# Altium PCB Sensor_Box_Hub_SAMD21.PCBDOC (part 3 of 3)
Units mm, origin at the board's own origin, x right, y up, seen from the top; angles counter-clockwise.
Board outline 33.7 x 72.8 mm, 2 copper layers (Top, Bot), stack 1.571 mm thick; 108 components, 111 nets, 446 pads, 221 vias.
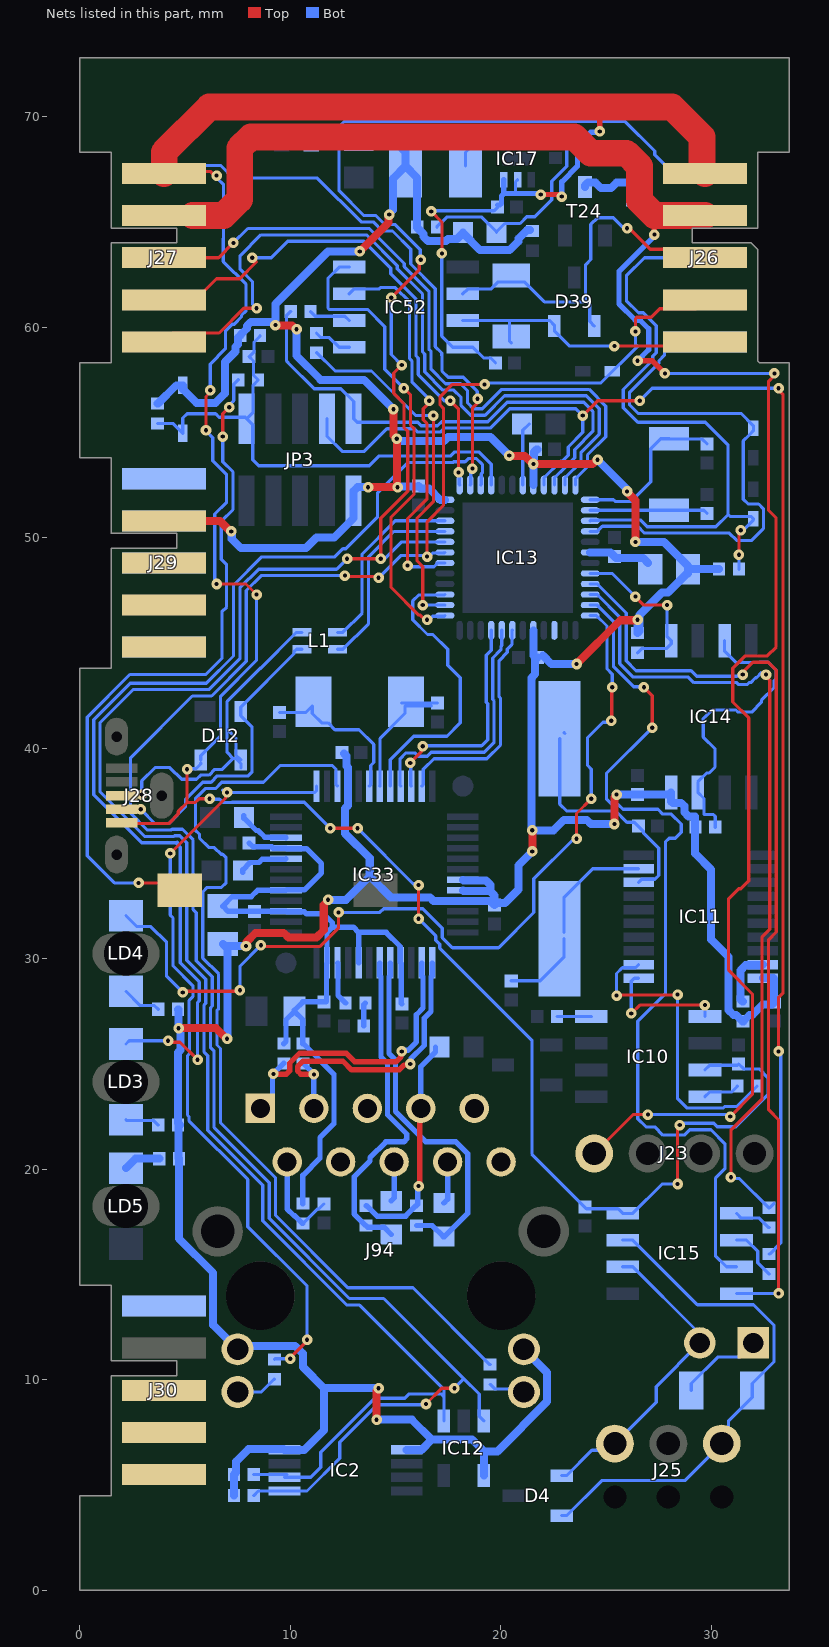
[diagram p2: the nets of this part, all layers, seen from the top]

## Via types
v1: diameter 0.5, hole 0.2, Top to Bot, tented both sides, 217 vias
v2: diameter 0.5, hole 0.2, Top to Bot, 2 vias
v3: diameter 1.2, hole 0.8, Top to Bot, tented both sides, 2 vias

## Nets (pads, with @x,y where several pads share a name; then routed paths per layer and width w, separated by ;. In a path a pad name is that pad's centre, name@x,y a point inside that pad or via, vN(x,y) a via of type N, cw(c..) or ccw(c..) an arc to the next point about the centre after c; other vN are vias at no path point) (continued)
IO0: D7.1 IC13.3 J26.8 R492.2 | length 31.7
  Top w0.152: v2(31.314,49.189) 31.314,50.264 v2(31.4,50.35)
  Bot w0.152: IC13.3@24.25,50.8 24.278,50.828 24.687,50.828 24.702,50.843 26.633,50.843 26.955,50.521 30.221,50.521 30.8,51.1 ; J26.8@29.7,63.3 26.828,63.3 25.971,62.443 25.971,61.257 26.543,60.685 26.767,60.685 27.385,60.067 27.385,58.782 27.217,58.614 27.217,58.44 25.817,57.04 25.817,56.176 26.514,55.479 29.715,55.479 30.8,54.393 30.8,51.1 ; R492.2@31.314,48.505 v2(31.314,49.189) ; v2(31.4,50.35) 31.516,50.35 32,50.834 D7.1@32,50.9 31.889,51.011 30.889,51.011 30.8,51.1
IO1: D6.1 IC13.4 J26.10 | length 26.3
  Bot w0.152: IC13.4@24.25,50.3 24.59,50.3 24.829,50.539 26.507,50.539 26.829,50.217 30.857,50.217 31.202,49.871 31.92,49.871 32.479,50.43 32.479,51.37 32.248,51.6 31.752,51.6 31.521,51.83 31.521,54.598 31.824,54.901 31.826,54.901 32,55.075 D6.1@32,55.2 32,55.325 31.425,55.9 26.523,55.9 26.121,56.302 26.121,56.913 27.521,58.313 27.521,58.415 27.776,58.67 27.776,58.876 28.2,59.3 J26.10@29.7,59.3
MODBUS_A: D39.1 IC52.6 J26.3 R14.2 | length 18.1
  Top w0.152: v1(26,64.7) 26.1,64.7 27.1,63.7 28.999,63.7 29.3,63.4 29.45,63.55 J26.3@29.7,63.3
  Bot w0.152: IC52.6@18.2,61.585 18.424,61.809 19.534,61.809 19.875,62.15 21.125,62.15 22.075,61.2 24.1,61.2 ; D39.1@24.45,60.05 24.226,60.274 24.226,61.074 24.1,61.2 ; v1(26,64.7) 25.85,64.7 25.35,65.2 24.6,65.2 24.279,64.879 24.279,63.213 24.029,62.963 24.029,61.271 24.1,61.2
MODBUS_B: D39.2 IC52.7 J26.5 R14.1 | length 13.3
  Top w0.152: v1(25.4,59.1) 29.5,59.1 J26.5@29.7,59.3
  Bot w0.152: IC52.7@18.2,60.315 20.415,60.315 ; R14.1@20.5,59.25 20.415,59.335 20.415,60.315 ; v1(25.4,59.1) 23.275,59.1 22.55,59.825 D39.2@22.55,60.05 22.55,60.091 22.326,60.315 20.415,60.315
MODBUS_DE: IC13.30 IC52.3 | length 18.6
  Top w0.152: v1(15.573,48.673) 15.573,50.903 16.493,51.823 16.493,55.43 16.321,55.602 16.321,56.127 16.6,56.406 v1(16.6,56.5)
  Bot w0.152: IC52.3@12.8,61.585 13.024,61.809 14.214,61.809 14.283,61.878 14.998,61.878 15.672,61.204 15.672,58.504 15.779,58.398 15.779,57.398 16.6,56.577 v1(16.6,56.5) ; v1(15.573,48.673) 15.625,48.621 16.831,48.621 17.01,48.8 IC13.30@17.35,48.8
MODBUS_DI: IC13.25 IC52.4 | length 22.4
  Top w0.152: v1(15.4,57.1) 15.712,56.788 15.712,55.349 15.883,55.178 15.883,52.076 14.79,50.982 14.79,47.633 16.102,46.321 16.184,46.321 16.406,46.1 v1(16.5,46.1)
  Bot w0.152: IC52.4@12.8,62.855 12.325,62.855 11.796,62.326 11.796,60.904 11.856,60.844 13.67,60.844 14.495,60.018 14.495,58.005 v1(15.4,57.1) ; v1(16.5,46.1) 16.594,46.1 16.766,46.272 17.322,46.272 IC13.25@17.35,46.3
MODBUS_R_En: IC52.2 R13.1 | length 2
  Bot w0.152: R13.1@10.97,60.75 10.97,60.73 11.184,60.516 12.599,60.516 IC52.2@12.8,60.315
MODBUS_RO: IC13.26 R18.1 | length 17.3
  Top w0.152: v1(16.3,46.8) 16.3,48.623 16.021,48.902 16.021,50.92 16.8,51.699 v1(16.8,55.8)
  Bot w0.152: R18.1@11.25,58.78 11.27,58.78 12.133,57.917 13.86,57.917 15.977,55.8 v1(16.8,55.8) ; v1(16.3,46.8) IC13.26@17.35,46.8
NetC43_2: C43.2 IC13.2 Q3.1 | length 5.6
  Bot w0.152: IC13.2@24.25,51.3 Q3.1@28,51.3 29.65,51.3 C43.2@29.8,51.15
NetC44_1: C44.1 IC13.1 Q3.2 | length 7.8
  Bot w0.152: IC13.1@24.25,51.8 25.355,51.8 25.433,51.721 26.198,51.721 27.126,52.649 27.126,54.226 27.6,54.7 Q3.2@28,54.7 28.016,54.684 29.566,54.684 C44.1@29.8,54.45
NetC45_2: C45.2 IC11.9 Q2.1 | length 9.6
  Bot w0.152: C45.2@20.5,28.95 21.876,28.95 23,30.074 Q2.1@23,30.95 ; Q2.1@23,31.25 23,32.9 24.375,34.275 IC11.9@26.55,34.275
NetC46_2: C46.2 IC11.8 Q2.2 | length 11.2
  Bot w0.152: Q2.2@22.8,40.45 22.8,37.347 23.13,37.017 24.86,37.017 25.46,37.017 25.993,36.484 26.333,36.484 26.784,36.033 26.784,35.964 27.504,35.245 27.504,33.955 27.322,33.774 26.699,33.774 IC11.8@26.55,33.625 ; Q2.2@23,40.75 Q2.2@23.05,40.7
NetC49_2: C49.2 IC13.43 | length 3
  Bot w0.152: IC13.43@21.05,52.5 21.05,55.1 C49.2@21.35,55.4
NetC51_1: C51.1 FB2.2 IC13.6 | length 3
  Bot w0.381: IC13.6@24.25,49.3 24.257,49.293 25.207,49.293 C51.1@25.4,49.1 25.466,49.034 26.766,49.034 FB2.2@27,48.8
NetC57_1: C57.1 IC17.6 R74.1 R75.2 | length 11.2
  Bot w0.152: R74.1@16.97,64.75 16.97,64.77 17.429,65.229 19.096,65.229 C57.1@19.8,64.525 ; C57.1@19.8,64.5 C57.1@19.8,64.525 ; IC17.6@21.45,69 22.57,69 R75.2@22.6,68.97 22.62,68.97 23.139,68.451 23.139,67.645 22.421,66.928 22.421,66.044 21.617,65.24 21.233,65.24 20.917,64.924 20.199,64.924 C57.1@19.8,64.525
NetC105_2: C105.2 IC33.22 | length 2.5
  Bot w0.254: C105.2@7.8,36.8 C105.2@7.8,36.7 7.8,36.675 8.386,36.089 8.476,36.089 8.792,35.773 9.777,35.773 IC33.22@9.8,35.75
NetC106_1: C106.1 IC33.20 | length 2.4
  Bot w0.254: C106.1@7.75,34.1 7.75,34.225 8.098,34.573 8.515,34.573 8.669,34.727 9.777,34.727 IC33.20@9.8,34.75
NetC114_2: C114.2 IC33.30 X1.1 | length 7.6
  Bot w0.152: C114.2@9.5,41.7 10.75,41.7 11.05,42 11.05,41.65 11.5,41.2 11.8,41.2 12.124,40.876 13.267,40.876 13.963,40.18 13.963,39.32 13.822,39.179 13.822,38.272 IC33.30@13.75,38.2
NetC115_2: C115.2 IC33.31 X1.2 | length 7.2
  Bot w0.152: IC33.31@14.25,38.2 14.268,38.218 14.268,40.468 15.45,41.65 15.45,42 C115.2@16.7,42 ; X1.2@15.3,42.15 C115.2@17,42.15
NetC118_1: C118.1 J94.9 R130.2 | length 4.6
  Bot w0.152: R130.2@10.6,17.43 10.62,17.43 11.306,18.116 11.366,18.116 C118.1@11.6,18.35
  Bot w0.254: J94.9@9.855,20.35 9.855,18.12 10.19,17.785 10.225,17.785 10.58,17.43 R130.2@10.6,17.43
NetC119_2: C119.2 J94.4 R131.1 R132.1 | length 10.7
  Top w0.254: v1(16.1,19.2) 16.147,19.247 16.147,22.832 J94.4@16.205,22.89
  Bot w0.254: R131.1@13.6,18.27 13.62,18.27 14.119,17.771 15.481,17.771 15.98,18.27 R132.1@16,18.27 16.053,18.323 16.053,19.153 v1(16.1,19.2) ; J94.4@16.205,22.89 16.205,24.88 16.9,25.575 C119.2@16.9,25.8
NetD4_1: D4.1 IC15.6 J25.1 JP2.2 | length 15
  Bot w0.152: D4.1@22.9,5.45 23.125,5.45 24.33,6.655 25.105,6.655 J25.1@25.42,6.97 27.388,8.938 27.388,9.678 JP2.2@29.46,11.75 29.202,12.008 29.202,12.438 26.275,15.365 IC15.6@25.8,15.365
NetD4_2: D4.2 IC15.7 J25.3 R59.1 | length 24.5
  Bot w0.152: D4.2@22.9,3.55 23.125,3.55 24.789,5.214 28.744,5.214 J25.3@30.5,6.97 30.815,7.285 30.815,8.04 31.95,9.175 R59.1@31.95,9.5 31.95,9.825 32.979,10.854 32.979,12.595 32.007,13.566 29.344,13.566 26.275,16.635 IC15.7@25.8,16.635
NetD5_1: D5.1 R19.2 T24.3 | length 4.2
  Bot w0.381: T24.3@24,66.65 24,66.736 24.135,66.87 24.491,66.87 24.754,66.607 25.246,66.607 25.509,66.87 26.151,66.87 R19.2@26.25,66.97 26.244,66.976 26.244,67.831 25.825,68.25 D5.1@25.7,68.25
NetD12_2: D12.2 J28.2 L1.4 | length 14.2
  Bot w0.152: v1(2.899,37.1) 3.577,36.421 4.223,36.421 5.033,37.231 5.033,37.576 5.843,38.386 6.24,38.386 6.538,38.683 8.007,38.683 8.179,38.855 8.179,41.021 7.65,41.55 D12.2@7.65,41.75 7.65,41.95 10.176,44.476 10.176,44.576 10.3,44.7 L1.4@10.55,44.7
NetD12_3: D12.3 J28.3 L1.1 | length 16
  Bot w0.152: v1(2.948,37.8) 2.948,38.449 3.577,39.079 4.284,39.079 4.841,38.521 5.547,38.521 5.747,38.721 6.145,38.721 6.417,38.994 6.778,38.994 7.251,39.467 ; D12.3@7.65,39.45 7.426,39.674 7.426,40.474 7,40.9 ; D12.3@7.659,39.059 7.659,39.275 7.426,39.508 7.292,39.508 7,39.8 7,40.9 ; L1.1@10.55,45.5 10.3,45.5 8.6,43.8 8.576,43.8 7,42.223 7,40.9
NetIC10_1: IC10.1 IC11.1 | length 6.1
  Top w0.152: v1(26.2,27.4) 26.21,27.4 26.61,27.8 v1(29.7,27.8)
  Bot w0.152: v1(26.2,27.4) 26.2,28.926 26.349,29.075 IC11.1@26.55,29.075 ; IC10.1@29.7,27.255 v1(29.7,27.8)
NetIC10_4: IC10.4 R58.1 | length 1.8
  Bot w0.152: IC10.4@29.7,23.445 29.924,23.669 30.969,23.669 31.23,23.93 R58.1@31.23,23.95
NetIC10_8: IC10.8 R57.2 | length 1.6
  Bot w0.152: R57.2@22.67,27.25 24.295,27.25 IC10.8@24.3,27.255
NetIC11_2: IC11.2 R58.2 | length 14.5
  Top w0.152: v1(25.5,28.25) 25.525,28.275 28.375,28.275 v1(28.4,28.3)
  Bot w0.152: v1(25.5,28.25) 25.5,29.298 25.778,29.576 26.401,29.576 IC11.2@26.55,29.725 ; v1(28.4,28.3) 28.4,23.347 28.83,22.916 30.57,22.916 30.632,22.979 31.219,22.979 32.17,23.93 R58.2@32.17,23.95
NetIC11_19: IC11.19 R56.2 | length 2.7
  Bot w0.381: R56.2@31.5,27.97 31.482,27.97 31.382,28.069 31.382,29.442 31.631,29.691 32.416,29.691 IC11.19@32.45,29.725
NetIC14_3: IC14.3 IC14.7 R70.1 | length 14.7
  Bot w0.152: R70.1@30.19,36.25 30.19,36.76 30.1,36.85 29.653,36.85 29.653,37.612 IC14.7@29.365,37.9 29.365,38.4 29.786,38.821 29.898,38.821 30.179,39.102 30.179,39.971 29.621,40.529 29.621,41.398 30.04,41.817 31.175,41.817 31.275,41.717 31.924,41.717 32.383,42.175 32.383,42.27 32.979,42.866 32.979,43.202 33.079,43.302 33.079,43.698 32.979,43.798 32.698,44.079 32.307,44.079 32.3,44.071 31.51,44.071 31.503,44.079 31.302,44.079 31.229,44.006 30.635,44.6 IC14.3@30.635,45.1
NetIC15_1: IC15.1 R64.2 | length 1.8
  Bot w0.152: IC15.1@31.2,17.905 31.424,17.681 32.279,17.681 32.73,17.23 R64.2@32.75,17.23
NetIC17_4: IC17.4 L3.1 | length 2.8
  Bot w0.152: L3.1@18.325,67.65 18.325,68.301 19.024,69 IC17.4@20.15,69
NetIC33_10: IC33.10 R127.1 | length 2.1
  Bot w0.254: IC33.10@12.25,29.8 12.273,29.777 12.273,28.257 R127.1@12.63,27.9
NetIC33_25: IC33.25 R125.1 | length 36.8
  Top w0.152: v1(4.3,35) 6.933,37.633 6.933,37.833 v1(7,37.9) ; v1(10,11) 10,11.05 10.8,11.85 v1(10.8,11.9)
  Bot w0.152: v1(4.3,35) 4.3,32.073 4.433,31.94 4.433,29.671 5.379,28.726 5.379,28.202 5.198,28.022 5.198,26.762 5.212,26.748 5.212,25.489 5.121,25.398 5.121,22.572 5.189,22.505 5.189,22.311 7.984,19.516 7.984,17.271 10.8,14.454 v1(10.8,11.9) ; v1@6.8,38 6.806,38 6.906,37.9 v1(7,37.9) 11.176,37.9 11.25,37.974 IC33.25@11.25,38.2 ; R125.1@9.25,10.97 9.28,11 v1(10,11)
NetIC33_27: IC33.27 R126.1 | length 44.3
  Bot w0.152: IC33.27@12.25,38.2 12.176,38.274 12.176,38.997 11.995,39.179 9.531,39.179 8.731,38.379 6.748,38.379 6.45,38.081 5.969,38.081 5.496,37.609 5.496,36.105 5.693,35.909 5.693,35.73 6.145,35.279 6.398,35.279 6.715,34.961 6.787,34.961 6.954,34.795 6.954,33.605 6.736,33.388 6.064,33.388 5.846,33.17 5.846,30.03 6.598,29.279 6.598,27.629 6.521,27.552 6.521,25.902 6.688,25.735 6.688,22.204 9.305,19.587 9.305,17.802 12.739,14.368 15.832,14.368 19.48,10.72 R126.1@19.5,10.72
NetIC52_1: IC52.1 R18.2 | length 1.8
  Bot w0.152: R18.2@11.25,59.72 11.464,59.506 11.864,59.506 12.325,59.045 IC52.1@12.8,59.045
NetJ26_7: J26.7 R19.1 | length 3.8
  Bot w0.381: R19.1@26.25,66.03 26.27,66.03 27,65.3 J26.7@29.7,65.3
NetJ94_1: J94.1
NetJ94_2: J94.2
NetJ94_6: J94.6
NetJ94_7: J94.7
NetJP2_1: JP2.1 R59.2 | length 4.1
  Bot w0.152: R59.2@29.05,9.5 29.05,9.825 30.301,11.076 31.326,11.076 JP2.1@32,11.75
NetLD3_2: LD3.2 R71.1 | length 1.6
  Bot w0.152: LD3.2@2.2,22.35 2.236,22.314 3.516,22.314 R71.1@3.73,22.1
NetLD4_2: LD4.2 R72.1 | length 1.9
  Bot w0.152: LD4.2@2.2,28.45 2.874,27.776 3.554,27.776 R72.1@3.73,27.6
NetLD5_2: LD5.2 R73.1 | length 1.8
  Bot w0.381: LD5.2@2.2,20.05 2.65,20.5 R73.1@3.78,20.5
NetPB1_2: PB1.2 R68.2 | length 33.1
  Top w0.152: v1(2.8,33.6) 4.4,33.6 PB1.2@4.75,33.25 ; v1(6.8,54.8) 6.8,55.886 6.914,56
  Bot w0.152: v1(2.8,33.6) 1.649,33.6 0.362,34.887 0.362,41.475 2.387,43.5 5.994,43.5 6.757,44.263 6.757,46.48 6.979,46.702 6.979,48.722 6.721,48.979 6.721,50.771 7.283,51.333 7.283,53.124 6.8,53.608 v1(6.8,54.8) ; v1(7.1,56.2) 7.1,56.294 7.316,56.51 7.316,57.286 R68.2@7.53,57.5
NetR127_2: R127.2 R262.1 | length 1.1
  Bot w0.254: R262.1@13.497,26.804 13.497,27.827 R127.2@13.57,27.9
P3V3: C41.2 C50.1 C52.1 C53.1 C54.1 C56.1 C57.2 C108.1 C110.1 D3.1 FB2.1 FB7.1 IC2.1 IC2.8 IC11.20 IC12.4 IC13.17 IC13.36 IC13.44 IC14.8 IC33.28 IC33.43 IC33.44 IC33.45 J29.2 J94.L1 J94.L3 JP3.1 L3.2 R20.2 R56.1 R62.2 R63.2 R66.1 R67.2 R69.2 R70.2 R71.2 R72.2 R73.2 R74.2 R492.1 | length 215.5
  Top w0.381: J29.2@4,50.8 6.668,50.8 7.168,50.3 v1(7.2,50.3) ; v1(4.7,26.7) 6.468,26.7 6.968,26.2 v1(7,26.2) ; v1(7.9,30.6) 7.923,30.623 7.923,30.791 8.363,31.231 9.692,31.231 9.916,31.007 11.246,31.007 11.593,31.354 11.593,32.561 11.8,32.768 v1(11.8,32.8) ; v1(9.3,60.1) 9.323,60.077 10.091,60.077 10.268,59.9 v1(10.3,59.9) ; v1(13.3,63.6) 14.677,64.977 14.677,65.327 v1(14.7,65.35) ; v1(13.7,52.4) v1(15.1,52.4) 15.082,52.418 15.082,54.682 v1(15.064,54.7) 14.9,54.864 v1(14.9,56.1) ; v1(14.1,8.1) 14.1,9.468 14.2,9.568 v1(14.2,9.6) ; v1(20.4,53.9) 20.423,53.877 21.141,53.877 21.518,53.5 v1(21.55,53.5) 24.368,53.5 24.568,53.7 v1(24.6,53.7) ; v1(21.5,35.1) v1(21.5,36.1) ; v1(23.6,44) 25.679,46.078 26.478,46.078 v1(26.5,46.1) ; v1(25.4,36.4) 25.4,37.668 25.5,37.768 v1(25.5,37.8) ; v1(26,52.2) 26,52.168 26.4,51.768 v1(26.4,49.8)
  Bot w0.381: R66.1@3.7,56.37 3.72,56.37 4.59,57.24 D3.1@4.9,57.24 4.9,57.05 5.543,56.407 6.446,56.407 6.897,56.859 6.897,58.35 7.397,58.85 7.397,59.052 7.531,59.185 7.531,59.501 R67.2@7.63,59.6 7.63,59.62 7.937,59.927 7.937,60.052 8.138,60.253 9.115,60.253 9.268,60.1 v1(9.3,60.1) ; R72.2@4.67,27.6 4.685,27.585 4.685,26.715 v1(4.7,26.7) 4.7,26.668 4.793,26.575 4.793,25.662 4.67,25.539 4.67,22.199 4.769,22.1 4.695,22.026 4.695,20.525 R73.2@4.72,20.5 4.72,16.703 6.343,15.08 6.343,12.607 J94.L1@7.5,11.45 7.653,11.603 10.236,11.603 10.6,11.238 10.6,10.6 11.6,9.6 ; FB7.1@6.8,30.7 FB7.1@6.9,30.6 ; v1(7,26.2) 7.017,26.217 7.017,30.483 FB7.1@6.9,30.6 ; v1(7.2,50.3) 7.223,50.277 7.223,49.939 7.654,49.507 10.746,49.507 11.245,50.007 12.092,50.007 13.015,50.93 JP3.1@13.015,51.75 13.015,52.211 13.205,52.4 v1(13.7,52.4) ; R63.2@7.33,4.5 R62.2@7.33,5.5 7.429,5.599 7.429,6.11 8.025,6.705 9.692,6.705 IC2.8@9.73,6.667 10.667,6.667 11.603,7.603 11.603,9.597 11.6,9.6 ; v1(7.9,30.6) FB7.1@6.9,30.6 ; v1@9.3,60.155 9.3,61.105 11.795,63.6 v1(13.3,63.6) ; v1(10.3,59.9) 10.3,58.645 11.447,57.498 13.502,57.498 v1(14.9,56.1) ; v1(11.8,32.8) 12.657,32.8 13.779,33.921 ; C110.1@12.55,39.75 12.669,39.63 12.669,39.165 12.743,39.092 12.743,38.207 IC33.28@12.75,38.2 12.743,38.193 12.743,37.281 12.607,37.146 12.607,35.954 13.779,34.783 13.779,33.921 ; C56.1@13.25,68.9 14.89,68.9 15.475,68.316 L3.2@15.475,67.65 ; v1(14.1,8.1) 14.103,8.103 15.298,8.103 15.3,8.105 15.775,8.105 16.723,7.157 ; v1(14.2,9.6) 11.6,9.6 ; v1(14.7,65.35) 14.7,65.382 14.89,65.573 14.89,67.066 L3.2@15.475,67.65 ; v1(15.064,54.7) 15.167,54.597 17.298,54.597 17.488,54.788 19.512,54.788 v1(20.4,53.9) ; v1(15.1,52.4) 15.123,52.423 16.073,52.423 C54.1@16.1,52.45 16.22,52.33 16.601,52.33 17.131,51.8 IC13.36@17.35,51.8 ; IC2.1@15.53,6.667 16.233,6.667 16.723,7.157 ; IC33.44@18.2,33.25 18.227,33.223 19.477,33.223 19.507,33.193 ; IC33.43@18.2,33.75 18.24,33.71 19.295,33.71 19.507,33.497 19.507,33.193 ; C57.2@18.2,64.5 C57.2@18.2,64.475 ; IC12.4@19.2,5.45 19.2,6.6 ; J94.L3@21.1,11.45 22.203,10.347 22.203,8.963 19.84,6.6 19.2,6.6 ; R20.2@21.401,64.621 21.256,64.621 20.836,64.201 20.836,64.076 20.417,63.657 19.018,63.657 C57.2@18.2,64.475 ; v1(21.5,35.1) 20.839,34.439 20.839,33.291 20.201,32.653 19.803,32.653 C108.1@19.7,32.55 ; C52.1@21.55,44.4 IC13.17@21.55,45.6 ; IC13.44@21.55,52.5 v1(21.55,53.5) 21.573,53.523 21.573,54.081 21.692,54.2 C53.1@21.75,54.2 ; C52.1@21.75,44.3 21.631,44.181 21.631,43.515 21.457,43.342 21.457,36.175 21.5,36.132 v1(21.5,36.1) 22.503,36.1 23.001,36.598 24.085,36.598 24.283,36.4 v1(25.4,36.4) ; C52.1@22,44.4 22.4,44 v1(23.6,44) ; v1(24.6,53.7) 25.977,52.323 25.977,52.223 v1(26,52.2) ; v1(25.5,37.8) C50.1@26.5,37.8 27.995,37.8 IC14.8@28.095,37.9 28.095,37.474 28.172,37.398 28.572,37.398 28.722,37.247 28.722,36.958 28.923,36.757 29.234,36.757 29.234,36.266 29.238,36.262 29.238,35 29.993,34.246 29.993,33.754 29.987,33.748 29.987,30.925 30.818,30.094 30.818,27.567 31.048,27.337 31.173,27.337 31.48,27.03 R56.1@31.5,27.03 31.52,27.03 31.827,27.337 31.952,27.337 32.445,27.831 32.881,27.831 C41.2@33,27.95 32.985,27.965 32.985,29.041 32.95,29.075 IC11.20@32.45,29.075 ; v1(26.4,49.8) 26.402,49.798 27.752,49.798 28.9,48.65 FB2.1@28.9,48.5 ; v1(26.5,46.1) R69.2@26.5,45.47 26.593,45.563 26.593,46.331 27.654,47.393 27.943,47.393 28.85,48.3 28.9,48.3 FB2.1@28.9,48.5 ; R492.1@30.374,48.505 28.905,48.505 FB2.1@28.9,48.5 ; 13.779,33.921 14.793,32.907 16.648,32.907 16.805,32.75 IC33.45@18.2,32.75 18.207,32.743 19.507,32.743 C108.1@19.7,32.55 ; L3.2@15.475,67.65 16.03,67.095 R74.2@16.03,64.75 16.03,64.73 16.337,64.423 16.337,64.298 16.538,64.097 17.402,64.097 17.495,64.191 17.915,64.191 C57.2@18.2,64.475 ; 16.723,7.157 18.643,7.157 19.2,6.6 ; 19.507,33.193 19.7,33 C108.1@19.7,32.55
P3V3A: C107.1 C109.1 C111.1 C112.1 C113.1 FB7.2 IC33.4 IC33.8 IC33.11 IC33.15 IC33.17 IC33.21 R128.2 R129.2 R130.1 | length 40.8
  Bot w0.254: C111.1@8.05,35.5 8.229,35.321 9.129,35.321 9.2,35.25 IC33.21@9.8,35.25 9.823,35.227 10.772,35.227 11.479,34.519 11.479,34.081 10.672,33.273 9.823,33.273 IC33.17@9.8,33.25 8.45,33.25 8.148,32.948 7.248,32.948 FB7.2@6.8,32.5 7.05,32.25 C112.1@8.3,32.25 IC33.15@9.8,32.25 9.823,32.227 10.674,32.227 10.772,32.129 11.581,32.129 12,31.71 12,31.5 ; R129.2@9.7,25.97 9.802,26.072 9.802,27.102 C107.1@10.2,27.5 ; R130.1@10.6,18.37 10.6,19.71 11.416,20.526 11.416,21.507 12.079,22.17 12.079,24.511 10.62,25.97 R128.2@10.6,25.97 R128.2@10.6,25.97 10.598,27.102 C107.1@10.2,27.5 ; IC33.8@13.25,29.8 13.25,31.25 ; C113.1@15.3,27.85 15.273,27.877 15.273,29.777 IC33.4@15.25,29.8 15.227,29.823 15.227,30.582 14.559,31.25 13.25,31.25 ; C107.1@10.2,27.5 10.2,27.552 10.598,27.95 11.7,27.95 11.727,27.977 11.727,29.777 IC33.11@11.75,29.8 11.75,31.25 12,31.5 ; 12,31.5 13,31.5 13.25,31.25
P5V0: C4.1 C42.2 C47.1 C55.2 D12.4 IC10.3 IC15.8 IC17.2 IC17.3 IC52.8 J26.1 J27.1 J28.1 | length 141.9
  Top w0.152: J28.1@2,36.45 2.029,36.421 4.223,36.421 4.679,36.877 4.679,36.999 5.1,37.421 ; J27.1@4.4,67.4 6.199,67.4 v1@6.45,67.149 ; v1(5.1,39) 5.1,37.421 ; v1(6,55.1) 6,56.706 6.2,56.906 v1(6.2,57) ; v1(6.167,37.602) 5.677,37.602 5.496,37.421 5.1,37.421 ; v1(6.5,47.8) 7.9,47.8 v1(8.4,47.3) ; v1(11.9,36.2) v1(13.2,36.2) ; v1(16.1,31.9) v1(16.1,33.5) ; v1(16.7,65.5) 17.205,64.995 v1(17.205,63.504) ; v1(28.4,19.3) 28.391,19.309 28.391,21.897 28.5,22.006 v1(28.5,22.1)
  Top w0.254: v1(21.9,66.3) 22.8,66.3 v1(22.9,66.2) ; 24.6,70.46 24.7,70.36 v1(24.7,69.3)
  Top w1.27: J27.1@4,67.3 4.012,67.312 4.012,68.312 6.16,70.46 24.6,70.46 28.14,70.46 29.565,69.035 29.565,67.435 J26.1@29.7,67.3
  Bot w0.152: v1@5.226,38.874 v1(5.1,39) 5.126,39.026 5.526,39.026 5.75,39.25 D12.4@5.75,39.299 ; D12.4@5.75,39.45 5.75,39.65 6.695,40.595 6.695,42.477 8.4,44.182 v1(8.4,47.3) ; v1(6,55.1) 6,55.066 6.321,54.744 6.321,53.655 6.979,52.998 6.979,51.688 6.417,51.126 6.417,47.977 6.5,47.894 v1(6.5,47.8) ; v1(6.167,37.602) 6.192,37.577 6.646,37.577 6.802,37.421 7.223,37.421 7.23,37.429 10.671,37.429 v1(11.9,36.2) ; v1(6.2,57) 6.2,58.246 6.921,58.967 6.921,59.815 7.245,60.139 7.339,60.139 7.687,60.487 7.687,60.556 7.905,60.774 7.905,62.032 6.821,63.115 6.821,64.198 6.835,64.212 6.835,66.764 6.5,67.099 v1(6.5,67.2) ; v1(13.2,36.2) 15.833,33.567 16.033,33.567 v1(16.1,33.5) ; v1(16.1,31.9) 16.917,31.083 16.917,30.879 17.103,30.692 17.103,30.504 21.479,26.128 21.479,20.721 C42.2@24,18.2 24.071,18.129 25.576,18.129 IC15.8@25.8,17.905 26.275,17.905 27.67,19.3 v1(28.4,19.3) ; v1(16.7,65.5) 16.733,65.533 19.683,65.533 C55.2@19.85,65.7 ; v1(17.205,63.504) 17.196,63.495 17.196,59.574 17.725,59.045 IC52.8@18.2,59.045 18.675,59.045 19.186,58.534 19.516,58.534 C4.1@19.75,58.3 ; 20.65,66.35 20.701,66.401 20.701,66.901 IC17.2@20.8,67 ; v1(28.5,22.1) 28.594,22.1 28.677,22.183 30.114,22.183 30.276,22.021 31.165,22.021 32.689,23.545 32.689,24.355 32.277,24.766 31.534,24.766 C47.1@31.3,25 31.239,24.939 29.924,24.939 IC10.3@29.7,24.715
  Bot w0.254: C55.2@19.85,65.8 19.95,65.8 20.033,65.883 20.033,66.233 20.15,66.35 ; IC17.3@20.15,67 20.15,66.35 ; v1(21.9,66.3) 21.908,66.3 21.954,66.346 20.35,66.346 20.346,66.35 20.15,66.35 ; v1(22.9,66.2) 22.9,66.904 23.646,67.649 23.646,68.616 24.283,69.253 24.653,69.253 v1(24.7,69.3)
P12V0: J23.1 J26.2 J27.2 | length 90.7
  Top w0.152: J23.1@24.44,20.75 26.29,22.6 v1(26.99,22.6) ; v1(30.9,22.5) 31.96,23.56 31.96,28.321 30.821,29.46 30.821,32.844 31.298,33.321 31.398,33.321 31.779,33.702 31.779,41.438 31.021,42.195 31.021,43.302 31.021,43.698 31.021,43.798 31.607,44.383 32.66,44.383 33.079,44.802 33.079,50.936 32.721,51.293 32.721,57.427 33,57.706 v1(33,57.8)
  Top w0.254: v1(26.5,58.4) 27.2,58.4 v1(27.8,57.8) ; v1(27.3,64.4) 27.3,65.3
  Top w1.27: J27.2@5.365,65.3 6.835,65.3 7.6,66.065 7.6,68.5 8.137,69.037 23.495,69.037 24.27,68.262 25.968,68.262 26.587,67.643 26.587,66.013 27.3,65.3 J26.2@29.7,65.3
  Bot w0.152: v1(26.99,22.6) v1@30.706,22.6 ; v1@27.961,57.8 v1(33,57.8)
  Bot w0.254: v1(26.5,58.4) 27.029,58.929 27.029,59.919 26.619,60.329 26.396,60.329 25.616,61.109 25.616,62.652 27.3,64.336 v1(27.3,64.4)
POE_VC1: J30.4
POE_VC1+: J30.3
POE_VC1-: J30.5
POE_VC2: J30.6
POE_VC3: J30.8
POE_VC4: J30.10
RESETn: C48.1 D3.2 IC13.40 JP3.10 R66.2 R67.1 R68.1 | length 24.9
  Bot w0.152: R66.2@3.7,55.43 4.43,55.43 D3.2@4.9,54.96 4.9,55.683 5.1,55.883 6.454,55.883 6.616,55.721 7.864,55.721 JP3.10@7.935,55.65 ; R67.1@8.57,59.6 8.57,59.58 8.284,59.294 8.284,58.834 C48.1@8.05,58.6 8.256,58.394 8.256,57.714 R68.1@8.47,57.5 8.47,57.48 8.239,57.249 8.239,55.954 JP3.10@7.935,55.65 ; IC13.40@19.55,52.5 19.55,53.491 18.977,54.064 17.788,54.064 17.598,53.873 14.207,53.873 13.755,53.421 8.502,53.421 8.221,53.702 8.221,55.364 JP3.10@7.935,55.65
RJ45_GRN: J94.L4 R126.2 | length 1.7
  Bot w0.152: R126.2@19.5,9.78 19.714,9.566 20.954,9.566 J94.L4@21.1,9.42
RJ45_RX_C_N: C117.2 J94.3 | length 2
  Bot w0.254: C117.2@17.3,18.4 17.475,18.575 J94.3@17.475,20.35
RJ45_RX_C_P: C116.2 J94.5 | length 1.9
  Bot w0.254: C116.2@14.8,18.5 14.935,18.635 J94.5@14.935,20.35
RJ45_RX_N: C117.1 IC33.5 R132.2 | length 17.4
  Bot w0.254: IC33.5@14.75,29.8 14.75,29.2 14.69,29.141 14.69,25.497 15,25.187 15,22.746 16.442,21.304 17.87,21.304 18.429,20.745 18.429,17.904 17.325,16.8 C117.1@17.3,16.8 17.275,16.8 16.745,17.33 R132.2@16,17.33
RJ45_RX_P: C116.1 IC33.6 R131.2 | length 16.2
  Bot w0.254: IC33.6@14.25,29.8 14.25,29.2 14.309,29.141 14.309,25.339 14.619,25.029 14.619,22.588 15.544,21.663 15.544,21.453 15.395,21.304 14.54,21.304 13.788,20.552 13.788,20.394 13.036,19.642 13.036,17.874 13.58,17.33 R131.2@13.6,17.33 13.682,17.248 14.452,17.248 C116.1@14.8,16.9
RJ45_TX_N: IC33.1 J94.8 R128.1 | length 14.4
  Top w0.254: v1(11.125,24.505) 11.112,24.517 10.502,24.517 10.353,24.666 10.353,24.877 10.612,25.136 12.496,25.136 12.912,24.72 15.177,24.72 15.41,24.953 15.653,24.953 v1(15.7,25)
  Bot w0.254: R128.1@10.6,25.03 10.62,25.03 11.125,24.525 v1(11.125,24.505) J94.8@11.125,22.89 ; v1(15.7,25) 15.747,25.047 15.747,25.266 16.371,25.89 16.371,27.183 16.691,27.503 16.691,29.141 16.75,29.2 IC33.1@16.75,29.8
RJ45_TX_P: IC33.2 J94.10 R129.1 | length 14.6
  Top w0.254: v1(9.2,24.53) 9.212,24.517 9.823,24.517 9.972,24.666 9.972,25.035 10.454,25.517 12.654,25.517 13.07,25.101 15.019,25.101 15.253,25.334 15.253,25.553 v1(15.3,25.6)
  Bot w0.254: J94.10@8.585,22.89 9.158,23.463 9.158,24.488 v1(9.2,24.53) 9.2,24.55 9.68,25.03 R129.1@9.7,25.03 ; v1(15.3,25.6) 15.347,25.647 15.59,25.647 15.99,26.047 15.99,27.341 16.31,27.66 16.31,29.141 16.25,29.2 IC33.2@16.25,29.8
RJ45_YEL: J94.L2 R125.2 | length 2
  Bot w0.152: J94.L2@7.5,9.42 8.62,9.42 9.23,10.03 R125.2@9.25,10.03
RS485_DE: IC13.11 IC15.3 | length 42.4
  Top w0.152: v1(26.8,42.9) 26.8,42.89 27.2,42.49 v1(27.2,40.977)
  Bot w0.152: IC13.11@24.25,46.8 24.585,46.8 25.352,46.034 25.352,43.893 26.321,42.923 26.777,42.923 v1(26.8,42.9) ; v1(27.2,40.977) 25.021,38.798 25.021,37.602 25.302,37.321 25.586,37.321 25.808,37.1 27.472,37.1 27.7,36.871 28.105,36.871 28.579,36.398 28.579,36.002 28.298,35.721 27.998,35.721 27.821,35.544 27.821,28.345 26.512,27.035 26.512,22.402 26.902,22.012 27.315,22.012 27.705,21.621 28.717,21.621 28.975,21.879 29.987,21.879 30.649,21.217 30.649,20.018 30.196,19.566 30.196,15.894 30.725,15.365 IC15.3@31.2,15.365
RS485_DI: IC13.9 IC15.4 | length 44.5
  Top w0.152: v1(31.5,43.5) 31.5,43.6 31.979,44.079 32.698,44.079 33.083,43.693 33.083,31.271 32.721,30.909 32.721,22.819 33.2,22.34 v1(33.2,14.1)
  Bot w0.152: IC13.9@24.25,47.8 24.585,47.8 25.961,46.424 25.961,44.145 26.423,43.683 29.04,43.683 29.302,43.421 31.227,43.421 31.406,43.6 31.5,43.506 v1(31.5,43.5) ; IC15.4@31.2,14.095 31.205,14.1 v1(33.2,14.1)
RS485_R_En: IC15.2 R12.1 | length 2.5
  Bot w0.152: IC15.2@31.2,16.635 31.675,16.635 32.207,16.103 32.207,15.553 32.73,15.03 R12.1@32.75,15.03
RS485_RO: IC13.10 R64.1 | length 39.3
  Top w0.152: v1(30.931,19.624) 30.931,21.855 32.417,23.34 32.417,31.035 32.779,31.398 32.779,43.227 v1@32.506,43.5 ; v1@32.5,43.506 v1@32.506,43.5 ; v1(32.6,43.5) v1@32.506,43.5
  Bot w0.152: IC13.10@24.25,47.3 24.585,47.3 25.657,46.229 25.657,44.019 26.297,43.379 28.914,43.379 29.176,43.117 31.206,43.117 31.302,43.021 31.698,43.021 31.793,43.117 31.876,43.117 32.102,43.343 32.148,43.343 32.406,43.6 32.506,43.5 v1(32.6,43.5) ; v1(30.931,19.624) 30.998,19.558 31.342,19.558 32.73,18.17 R64.1@32.75,18.17 32.77,18.17 R64.1@32.984,18.384
RX_CLK: J29.4
RX_DV: J29.3
RXD0: J29.6
RXD1: J29.5
RXLED: IC13.12 LD4.1 | length 43
  Top w0.152: v1(4.9,28.4) 4.952,28.452 7.558,28.452 v1(7.61,28.504) ; v1(8.608,30.638) 8.658,30.588 11.419,30.588 12.3,31.469 v1(12.3,32.2) ; v1(23.6,35.7) 23.6,36.9 v1(24.3,37.6) ; v1(25.25,41.3) 25.275,41.325 25.275,42.875 v1(25.3,42.9)
  Bot w0.152: LD4.1@2.2,32.05 2.721,31.529 3.38,31.529 4.129,30.78 4.129,29.171 v1(4.9,28.4) ; v1(7.61,28.504) 7.61,29.633 8.608,30.631 v1(8.608,30.638) ; v1(12.3,32.2) 14.257,32.2 14.435,32.379 16.298,32.379 17.221,31.455 17.221,31.005 17.705,30.521 19.898,30.521 21.571,32.195 21.571,33.795 23.41,35.633 23.533,35.633 v1(23.6,35.7) ; IC13.12@24.25,46.3 24.55,46.3 25.047,45.803 25.047,43.767 25.3,43.514 v1(25.3,42.9) ; v1(24.3,37.6) 24.3,39.007 24.121,39.185 24.121,40.498 24.857,41.233 25.183,41.233 v1(25.25,41.3)
SCL/Rx: D10.1 IC2.6 IC12.1 IC13.32 J26.6 R62.1 | length 118.8
  Top w0.152: v1(12.7,49) v1@14.277,49 ; v1(14.3,49) v1@14.277,49 ; v1(14.8,61.4) 16.133,62.733 16.133,63.133 v1(16.2,63.2) ; v1(15.3,58.2) 14.921,57.821 14.921,56.855 15.407,56.37 15.407,55.223 15.579,55.051 15.579,52.202 14.3,50.923 14.3,49.023 v1@14.277,49
  Bot w0.152: R62.1@8.27,5.5 IC2.6@9.835,5.5 ; IC2.6@9.73,5.367 10.979,5.367 11.449,5.836 11.449,6.556 14.014,9.121 15.448,9.121 15.655,9.329 17.171,9.329 17.3,9.2 ; D10.1@11,68.6 12.221,68.6 12.321,68.5 ; v1(12.7,49) 12.205,48.505 8.497,48.505 7.61,47.617 7.61,44.253 6.14,42.783 2.532,42.783 0.971,41.223 0.971,37.92 3.079,35.812 4.475,35.812 4.506,35.843 4.758,35.843 5.083,35.517 5.083,29.931 5.988,29.026 5.988,27.881 5.912,27.805 5.912,25.565 6.079,25.398 6.079,21.852 8.695,19.236 8.695,17.549 12.698,13.547 13.297,13.547 17.3,9.544 17.3,9.2 ; v1@14.517,49.024 15.292,49.8 IC13.32@17.35,49.8 ; v1(14.8,61.4) 14.8,58.7 v1(15.3,58.2) ; v1(16.2,63.2) 16.178,63.222 16.178,63.679 14.985,64.871 14.502,64.871 14.068,65.305 13.497,65.305 12.321,66.48 12.321,69.52 12.58,69.779 25.9,69.779 27.311,68.368 27.311,68.189 28.2,67.3 J26.6@29.7,67.3 ; IC12.1@17.3,8.05 17.3,9.2
SDA/Tx: D11.1 IC2.5 IC12.3 IC13.31 J26.4 R63.1 | length 97.7
  Top w0.152: v1(12.6,48.2) 12.65,48.15 14.15,48.15 v1(14.2,48.1) ; v1(16.45,8.85) 17.2,9.6 v1(17.8,9.6) ; v1(16.5,49.1) 16.5,50.75 17.279,51.529 17.279,56.144 17.121,56.302 17.121,56.698 17.706,57.283 v1(19.233,57.283) ; v1(26.4,59.8) 26.4,60.406 26.466,60.471 27.143,60.471 27.55,60.879 29.279,60.879 J26.4@29.7,61.3
  Bot w0.152: R63.1@8.27,4.5 8.487,4.717 IC2.5@9.73,4.717 10.797,4.717 12.353,6.273 12.353,7.03 14.14,8.817 16.417,8.817 v1(16.45,8.85) ; v1(12.6,48.2) 8.623,48.2 7.914,47.491 7.914,44.127 6.266,42.479 5.355,42.479 2.42,39.544 2.42,36.902 3.205,36.117 4.349,36.117 4.379,36.147 4.885,36.147 5.388,35.644 5.388,32.336 5.542,32.183 5.542,29.904 6.293,29.153 6.293,27.755 6.217,27.678 6.217,25.776 6.383,25.609 6.383,21.979 9,19.362 9,17.676 12.813,13.863 14.437,13.863 18.25,10.05 ; v1(14.2,48.1) 15.252,49.152 16.448,49.152 v1(16.5,49.1) 16.594,49.1 16.766,49.272 17.322,49.272 IC13.31@17.35,49.3 ; v1(17.8,9.6) 18.25,10.05 ; IC12.3@19.2,8.05 18.976,8.274 18.976,9.324 18.25,10.05 ; v1(19.233,57.283) 19.276,57.326 19.276,57.4 19.328,57.348 24.756,57.348 26.5,59.092 26.4,59.192 v1(26.4,59.8)
SPI0_SS0: IC13.15
SPI0_SS1: IC13.8 IC14.1 R69.1 | length 8
  Top w0.152: v1(26.4,47.2) 26.8,46.8 v1(27.9,46.8)
  Bot w0.152: IC13.8@24.25,48.3 25.3,48.3 v1(26.4,47.2) ; R69.1@26.5,44.53 26.701,44.731 27.871,44.731 28.095,44.955 IC14.1@28.095,45.1 27.9,45.295 v1(27.9,46.8)
SPI1_MISO: IC13.21 IC33.34 | length 10.7
  Top w0.152: v1(15.7,39.3) 16.226,39.826 16.226,40.026 v1(16.293,40.093)
  Bot w0.152: v1(15.7,39.3) 15.725,39.275 15.725,38.225 IC33.34@15.75,38.2 ; v1(16.293,40.093) 16.313,40.113 19.09,40.113 19.379,40.402 19.379,42.121 19.312,42.188 19.312,44.412 19.55,44.65 IC13.21@19.55,45.6
SPI1_MOSI: IC13.19 IC33.35 | length 10.7
  Bot w0.152: IC33.35@16.25,38.2 16.324,38.274 16.324,38.997 16.83,39.504 19.343,39.504 19.988,40.149 19.988,42.373 19.921,42.44 19.921,44.159 20.311,44.549 20.311,44.705 20.528,44.921 20.528,45.578 IC13.19@20.55,45.6
SPI1_NSS: IC13.27 IC33.32 | length 13.8
  Bot w0.152: IC33.32@14.75,38.2 14.75,39.458 15.864,40.571 16.395,40.571 17.448,40.571 18.079,41.202 18.079,43.344 17.479,43.944 17.479,44.698 16.777,45.4 16.523,45.4 15.821,46.102 15.821,46.998 16.102,47.279 17.329,47.279 IC13.27@17.35,47.3
SPI1_SCK: IC13.20 IC33.33 | length 11.8
  Bot w0.152: IC33.33@15.25,38.2 15.221,38.229 15.221,39.498 15.502,39.779 15.924,39.779 16.088,39.614 16.51,39.614 16.704,39.808 19.216,39.808 19.683,40.276 19.683,42.247 19.617,42.314 19.617,44.286 20.007,44.676 20.007,44.831 20.05,44.874 IC13.20@20.05,45.6
SWCLK: IC13.45 JP3.4 R12.2 | length 69.8
  Top w0.152: v1(23.9,55.8) 24.6,56.5 v1(26.6,56.5) ; v1@33.152,56.948 33.257,56.948 33.414,56.792 33.414,28.383 33.2,28.169 v1(33.2,25.6)
  Bot w0.152: JP3.4@11.745,55.65 11.745,54.83 12.475,54.1 13.515,54.1 14.594,55.179 15.899,55.179 16.062,55.016 17.124,55.016 17.315,55.207 19.509,55.207 20.43,56.129 21.57,56.129 23.57,56.129 23.862,55.836 v1@23.862,55.8 ; IC13.45@22.05,52.5 22.05,52.835 22.846,53.631 22.925,53.631 23.207,53.914 23.207,54.309 23.9,55.002 v1(23.9,55.8) ; v1(26.6,56.5) 27.2,57.1 v1(33.2,57.1) ; R12.2@32.75,15.97 32.77,15.97 33.305,16.505 33.305,25.401 33.2,25.506 v1(33.2,25.6)
SWDIO: IC13.46 JP3.2 R13.2 | length 23.7
  Bot w0.152: R13.2@10.03,60.75 9.821,60.541 9.821,58.411 9.893,58.34 9.893,58.322 11.136,57.079 12.406,57.079 13.015,56.47 JP3.2@13.015,55.65 13.182,55.483 16.054,55.483 16.216,55.321 16.998,55.321 17.189,55.512 19.382,55.512 20.304,56.433 21.696,56.433 23.943,56.433 24.379,55.998 24.379,55.049 23.512,54.182 23.512,53.787 23.051,53.327 23.041,53.327 22.55,52.835 IC13.46@22.55,52.5
TX_EN: J29.8
TXD0: J29.7
TXD1: J29.10
TXLED: IC13.39 LD3.1 | length 50.5
  Top w0.152: v1(4.2,26.1) 4.267,26.033 4.766,26.033 v1(5.6,25.2)
  Bot w0.152: LD3.1@2.2,25.95 2.35,26.1 v1(4.2,26.1) ; 4.632,35.538 4.632,35.445 ; v1(5.6,25.2) 5.6,27.924 5.683,28.007 5.683,28.9 4.779,29.805 4.779,35.298 4.632,35.445 ; IC13.39@19.05,52.5 19.078,52.528 19.078,53.03 19.131,53.082 19.131,53.479 18.851,53.759 18.774,53.759 18.454,53.759 18.307,53.612 17.767,53.612 17.724,53.569 15.592,53.569 14.141,52.118 14.141,50.973 12.647,49.479 12.502,49.479 12.111,49.088 8.649,49.088 7.305,47.744 7.305,44.38 6.013,43.088 2.406,43.088 0.667,41.349 0.667,37.793 2.953,35.507 4.57,35.507 4.632,35.445
U1_CTS: IC13.38 J27.6 | length 27.1
  Top w0.152: v1(18.652,53.28) 18.652,56.152 18.9,56.4 v1(18.9,56.6)
  Bot w0.152: J27.6@4,67.3 4.221,67.079 5.921,67.079 5.921,67.678 6.698,67.678 7.298,67.079 11.292,67.079 13.371,65 13.942,65 14.376,64.567 14.859,64.567 15.721,63.704 15.721,63.002 16.892,61.832 16.892,59.077 17.196,58.773 17.196,58.65 17.21,58.637 17.21,57.914 17.502,57.621 18.217,57.621 18.888,56.951 18.888,56.612 v1(18.9,56.6) ; IC13.38@18.55,52.5 18.578,52.528 18.578,53.112 18.652,53.186 v1(18.652,53.28)
U1_RTS: IC13.37 J27.4 | length 24.7
  Top w0.152: J27.4@4,61.3 5.5,61.3 6.5,62.3 7.6,62.3 8.4,63.1 v1(8.2,63.3) ; v1(17.6,56.5) 18,56.1 v1(18,53.1)
  Bot w0.152: v1(8.2,63.3) 9.1,63.3 9.879,64.078 13.498,64.078 14.779,62.798 14.779,62.529 15.977,61.331 15.977,58.631 16.083,58.524 16.083,57.747 17.321,56.509 17.591,56.509 v1(17.6,56.5) ; v1(18,53.1) 18.025,53.075 18.025,52.525 IC13.37@18.05,52.5
U1_RXD: IC13.48 J27.3 | length 32.7
  Top w0.152: J27.3@4,63.3 6.6,63.3 v1(7.3,64)
  Bot w0.152: v1(7.3,64) 7.988,64.688 13.751,64.688 15.417,63.022 15.417,62.876 16.587,61.705 16.587,58.951 16.693,58.845 16.693,57.999 17.376,57.317 18.091,57.317 18.421,56.986 18.421,56.402 18.702,56.121 19.13,56.121 20.052,57.043 21.948,57.043 24.196,57.043 24.988,56.251 24.988,54.797 24.121,53.93 24.121,53.371 23.55,52.8 IC13.48@23.55,52.5
U1_TXD: IC13.47 J27.5 | length 36.3
  Top w0.152: J27.5@4,59.3 4.424,59.724 6.624,59.724 7.8,60.9 v1(8.4,60.9)
  Bot w0.152: v1(8.4,60.9) 8.21,61.09 8.21,62.158 7.621,62.747 7.621,63.398 8.606,64.383 13.624,64.383 15.083,62.924 15.083,62.778 16.282,61.579 16.282,58.825 16.388,58.719 16.388,57.873 17.249,57.012 17.765,57.012 18.117,56.66 18.117,56.275 18.575,55.816 19.256,55.816 20.178,56.738 21.822,56.738 24.07,56.738 24.683,56.124 24.683,54.923 23.817,54.056 23.817,53.602 23.05,52.835 IC13.47@23.05,52.5
USB_D_N: IC13.33 L1.3 | length 9.3
  Bot w0.152: L1.3@12.25,44.7 12.5,44.7 13.721,45.921 13.721,49.098 14.923,50.3 IC13.33@17.35,50.3
USB_D_P: IC13.34 L1.2 | length 8.9
  Bot w0.152: L1.2@12.25,45.5 12.5,45.5 13.417,46.417 13.417,49.224 14.992,50.8 IC13.34@17.35,50.8
pads on no net: IC10.5 IC11.3 IC11.4 IC11.5 IC11.6 IC11.7 IC11.11 IC11.12 IC11.15 IC13.7 IC17.1 IC33.7 IC33.12 IC33.13 IC33.18 IC33.23 IC33.24 IC33.26 IC33.38 IC33.39 IC33.40 IC33.41 IC33.42 IC33.46 IC33.47 IC33.FTG1 IC33.FTG2 J25.4 J25.5 J25.6 J28.4 J30.1 J30.2 J30.7 J30.9 J94.MH1 J94.MH2 JP3.6 JP3.7 JP3.8 LD3.3 LD4.3 LD5.3
copper on no net: | length 0

## Polygon pours and split planes (outlines as drawn)
GND on Top "Signal Layer 1-No Net 1" (solid, remove dead copper, pour order 0): 0,72.8 33.6,72.8 33.7,72.7 33.7,0 0,0
GND on Bot "Signal Layer 1-No Net 1" (solid, remove dead copper, pour order 2): 0,72.8 33.7,72.8 33.7,0 0,0

## Keep-outs
Top:
  lines w0.1: 0,0.9 33.7,0.9 ; 0,71.9 33.7,71.9 ; 33.65,70.15 33.7,70.1 ; 33.7,71.9 33.7,71.9
Bot:
  lines w0.1: 0,2.65 33.35,2.65 ; 0,70.15 33.65,70.15
KeepOutLayer:
  lines w0.1: 0,68.25 0,72.75 33.65,72.75 33.7,72.7 33.7,68.3 ; 3.7,52 4.2,52 ; 4.7,58.3 0,58.3 0,53.8 6,53.8 ; 5.9,6.3 5.9,6.8 ; 5.9,45.6 5.9,46 ; 5.9,47.6 5.9,48 ; 5.9,49.6 5.9,50 ; 5.9,51.6 5.9,52 ; 5.9,60.2 5.9,60.5 ; 5.95,8.2 5.95,8.7 ; 5.95,10.2 5.95,10.7 ; 5.95,12.2 5.95,12.7 ; 6,64.1 6,64.3 ; 6,66.2 6,66.5 ; 27.85,66.5 27.9,66.2 ; 27.9,60.1 27.9,60.5 ; 27.9,62.2 27.9,62.4 ; 27.9,64.1 27.9,64.4 ; 0,0 0,4.5 ; 0,0 0,0 ; 0,0 33.7,0 ; 0,4.5 5.9,4.5 ; 0,4.5 0,4.5 ; 0,43.8 5.9,43.8 ; 0,43.8 0,43.8 ; 0,43.8 0,14.5 5.9,14.5 ; 5.9,4.5 5.9,4.5 ; 5.9,14.5 5.9,14.5 ; 5.9,43.8 5.9,43.8 ; 6,53.8 6,53.8 ; 27.8,58.3 27.8,58.3 ; 27.8,58.3 33.7,58.3 33.7,0 ; 33.7,0 33.7,0 ; 33.7,68.3 33.7,68.3 ; 27.8,68.3 27.8,68.3

## Other copper
Bot:
  rectangle net GND: 5.1,60.9 6.8,61.5
  rectangle net GND: 26.8,61 27.9,61.7

## Silkscreen, mask and mechanical layers (free items; w line width, h text height)
TopOverlay:
  lines w0.2: 1.7,1.6 0.7,2.6 1.7,3.6
  text "System Controller / SAM21D" at 7,51.75 h1.5
  text "v1.0" at 17.8,49.6 h1.52
  text "USB" at 6.8,36.7 h1.5 r90
  text "RESET" at 8.8,35.9 h1.5
  text "Rx" at 2.2,31.55 h1.5
  text "CAN" at 26.75,26.75 h1.5
  text "Tx" at 3.6,25.45 h1.5
  text "H" at 26.8,24.365 h1.5
  text "L" at 29.5,24.365 h1.5
  text "G" at 32,24.265 h1.5
  text "V" at 23.95,23.965 h1.5
  text "PWR" at 0.6,14.95 h1.5
  text "MODBUS" at 23.75,13.5 h1.5
  text "TERM" at 22.5,11.25 h1.5
  text "POE" at 1.7,1.9 h1.5
  text "A" at 24.975,1.302 h1.5
  text "G" at 27.5,1.302 h1.5
  text "B" at 30,1.202 h1.5
Mechanical1:
  lines w0.2: 0,4.5 0,0 33.7,0 ; 0,14.5 0,43.3 ; 0,43.8 0,43.3 ; 0,43.3 0,43.3
  lines w0.254: 0,4.5 1.5,4.5 ; 0,14.5 0.5,14.5 ; 0,43.8 1.5,43.8 1.5,49.5 4.6,49.5 4.6,49.8 4.6,50.1 1.5,50.1 1.5,53.8 0,53.8 0,58.3 1.5,58.3 1.5,64 4.6,64 4.6,64.6 1.5,64.6 1.5,68.3 0,68.3 0,72.8 33.7,72.8 33.7,68.3 32.2,68.3 32.2,64.6 29.1,64.6 29.1,64 31.9,64 32.1,63.8 32.2,63.7 32.2,58.4 32.3,58.3 33.7,58.3 33.7,1.5 33.7,0 ; 0.5,14.5 0.5,14.5 ; 0.5,14.5 1.5,14.5 1.5,10.8 4.6,10.8 4.6,10.2 1.5,10.2 1.5,4.5 ; 1.5,4.5 1.5,4.5

## Text inside footprints (layer, text, board x,y; h text height)
J23: TopOverlay "3" at 29.139,22.528 h1; TopOverlay "2" at 26.599,22.528 h1; TopOverlay "1" at 24.313,22.528 h1; TopOverlay "4" at 31.679,22.528 h1
J25: TopOverlay "1" at 25.293,8.748 h1; TopOverlay "2" at 27.579,8.748 h1; TopOverlay "3" at 30.119,8.748 h1
J26: BottomOverlay "10" at 25.3,59.9 h1.2 r180; BottomOverlay "6" at 26.35,67.88 h1.2 r180; TopOverlay "5" at 26.175,58.7 h1.2; TopOverlay "1" at 26.475,66.68 h1.2
J27: BottomOverlay "6" at 7.25,67.7 h1.2 r180; BottomOverlay "10" at 6.95,59.72 h1.2 r180; TopOverlay "1" at 7.125,66.5 h1.2; TopOverlay "5" at 6.825,58.52 h1.2
J29: BottomOverlay "6" at 7.25,53.2 h1.2 r180; BottomOverlay "10" at 6.95,45.22 h1.2 r180; TopOverlay "1" at 7.125,52 h1.2; TopOverlay "5" at 6.825,44.02 h1.2
J30: BottomOverlay "6" at 7.25,13.9 h1.2 r180; BottomOverlay "10" at 6.95,5.92 h1.2 r180; TopOverlay "1" at 7.125,12.7 h1.2; TopOverlay "5" at 6.825,4.72 h1.2